# Altium PCB PCB1.PcbDoc
Units mil, origin at the board's own origin, x right, y up, seen from the top; angles counter-clockwise.
Board outline 1020 x 805 mil, 2 copper layers (Top Layer, Bottom Layer); 7 components, 4 nets, 15 pads, 0 vias.
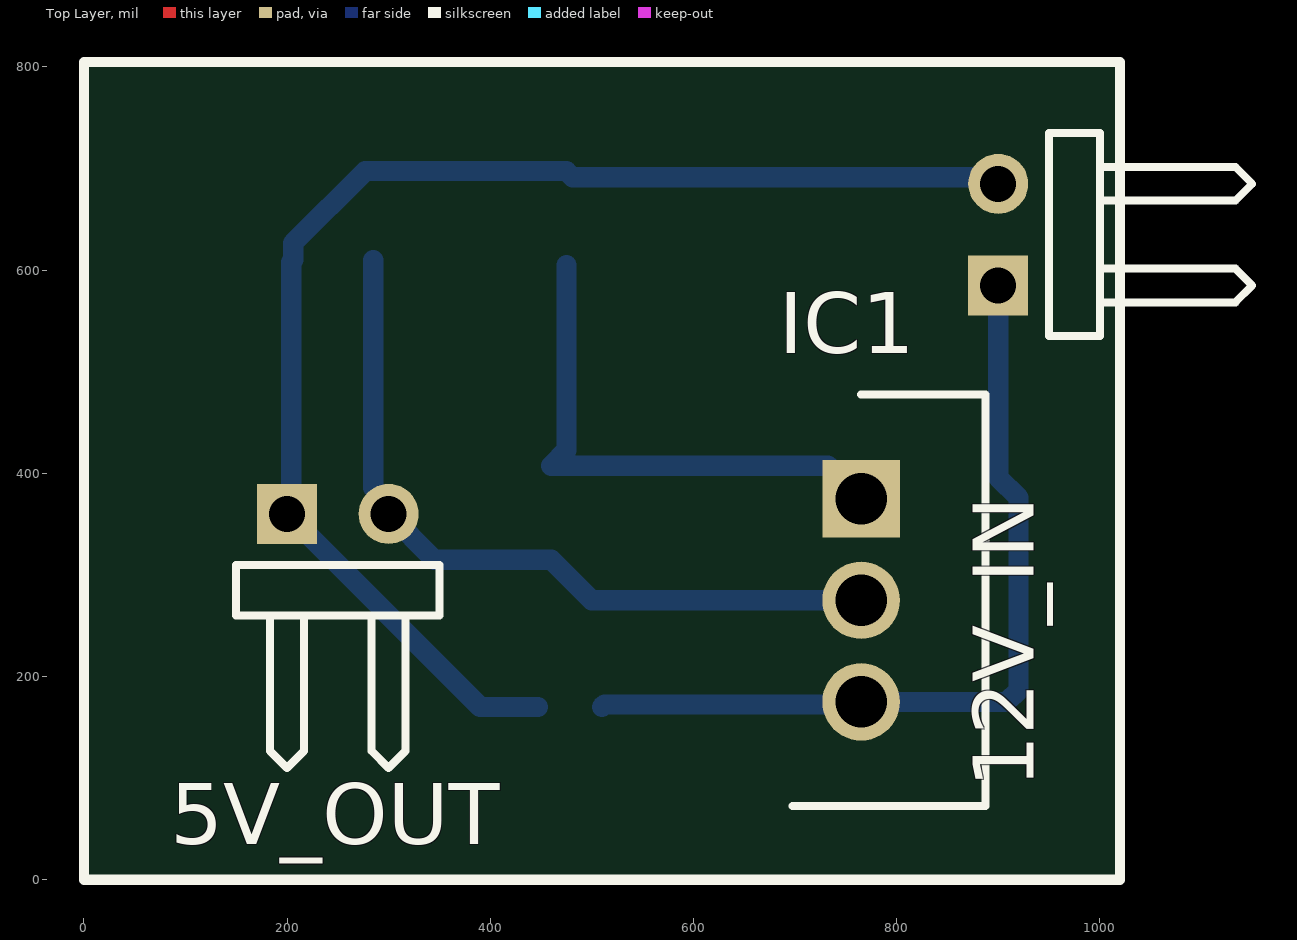
[diagram p0: Top Layer view]
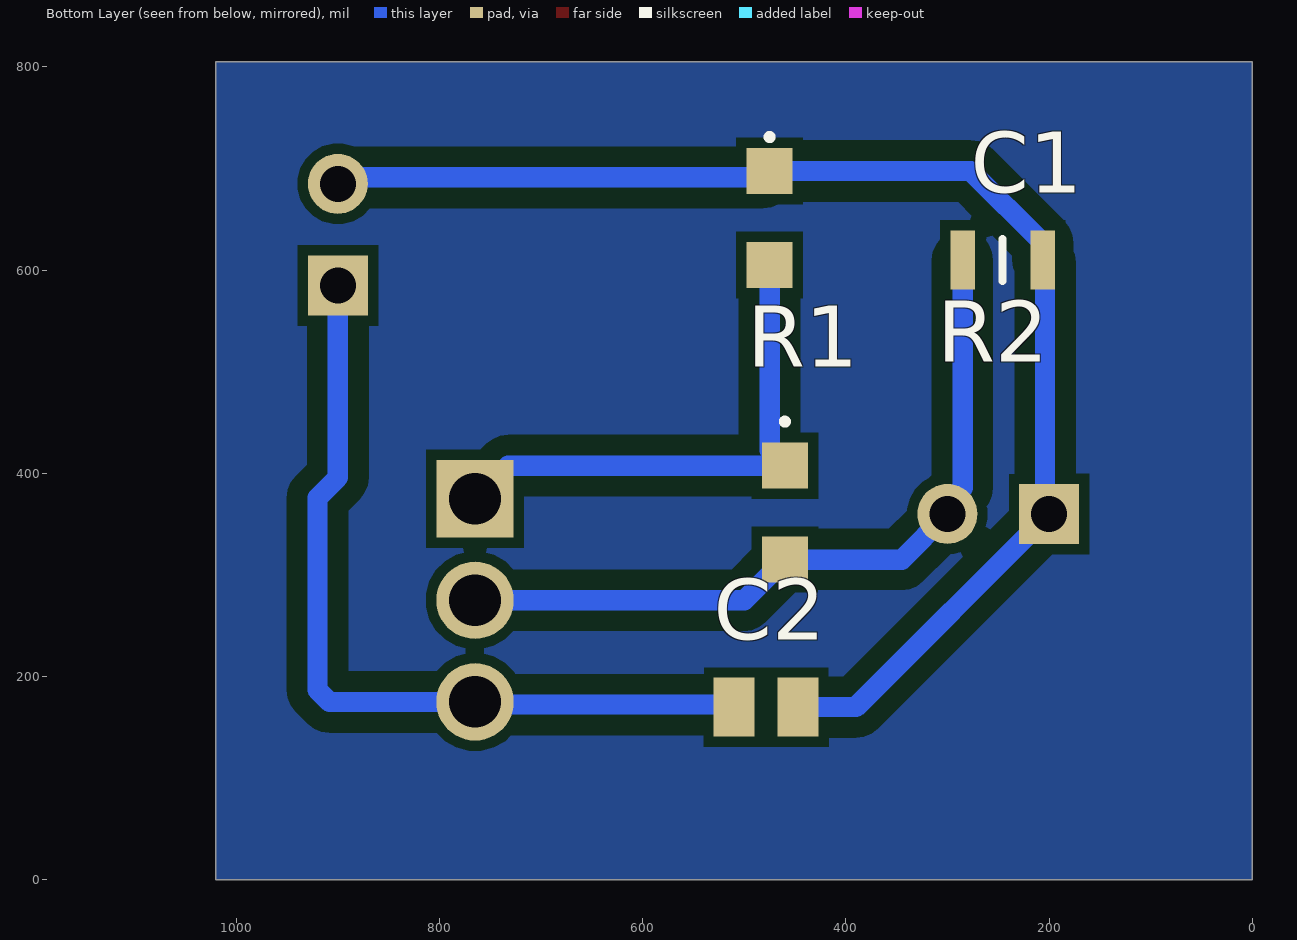
[diagram p1: Bottom Layer view, seen from below]
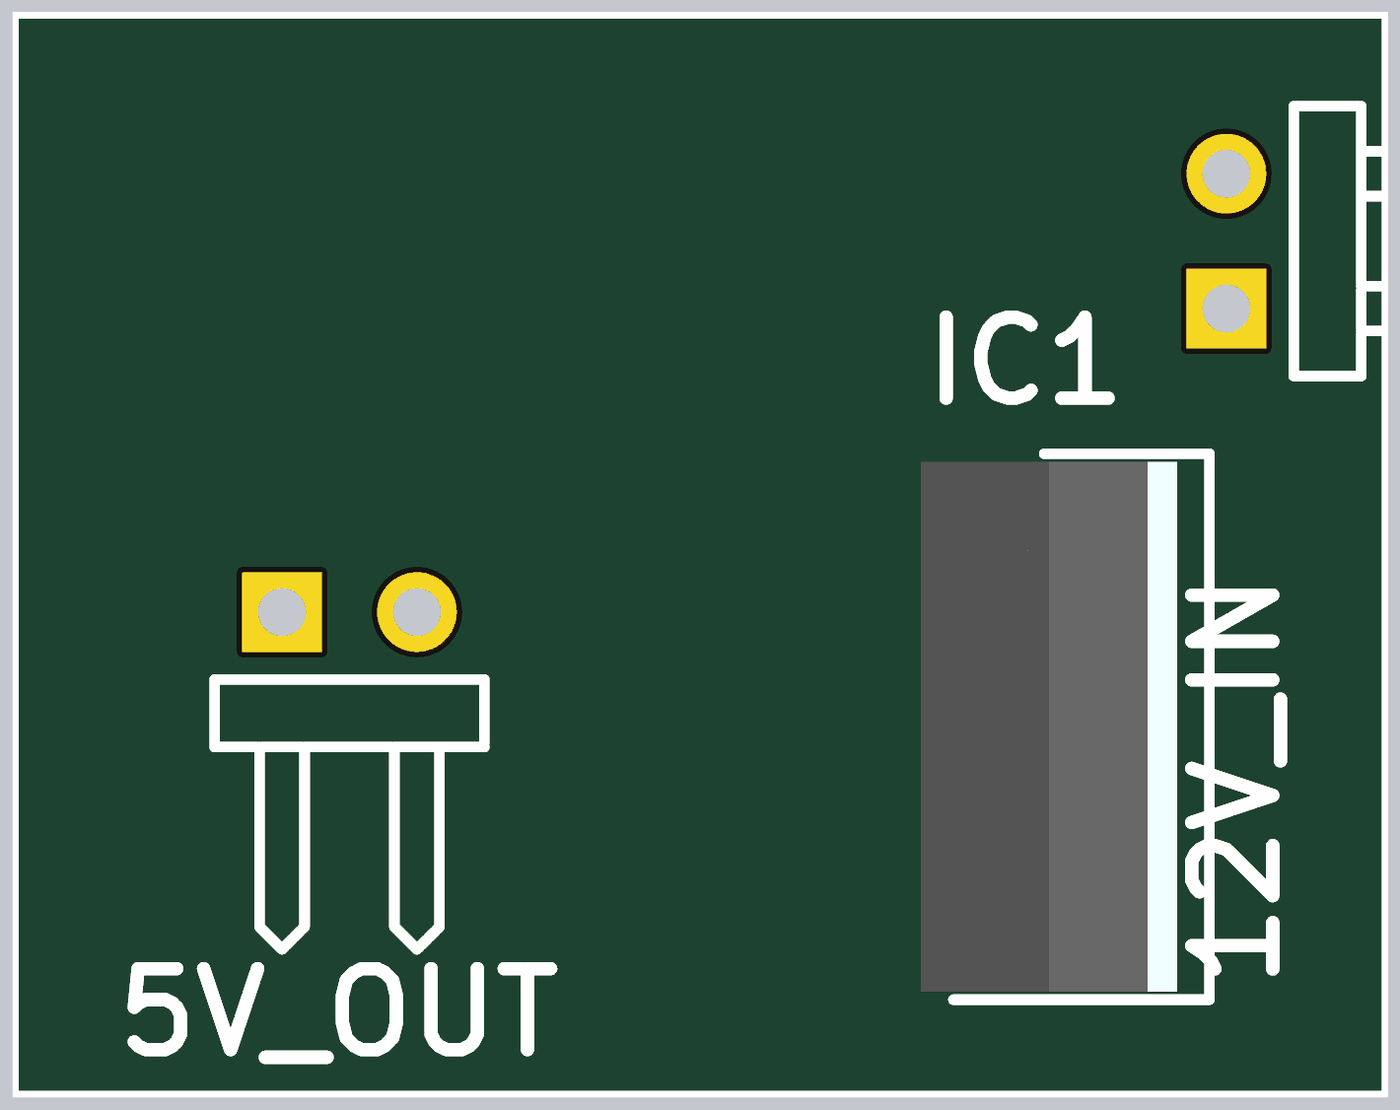
[diagram p2: 3D render of the assembled board from above, using the file's embedded part models]
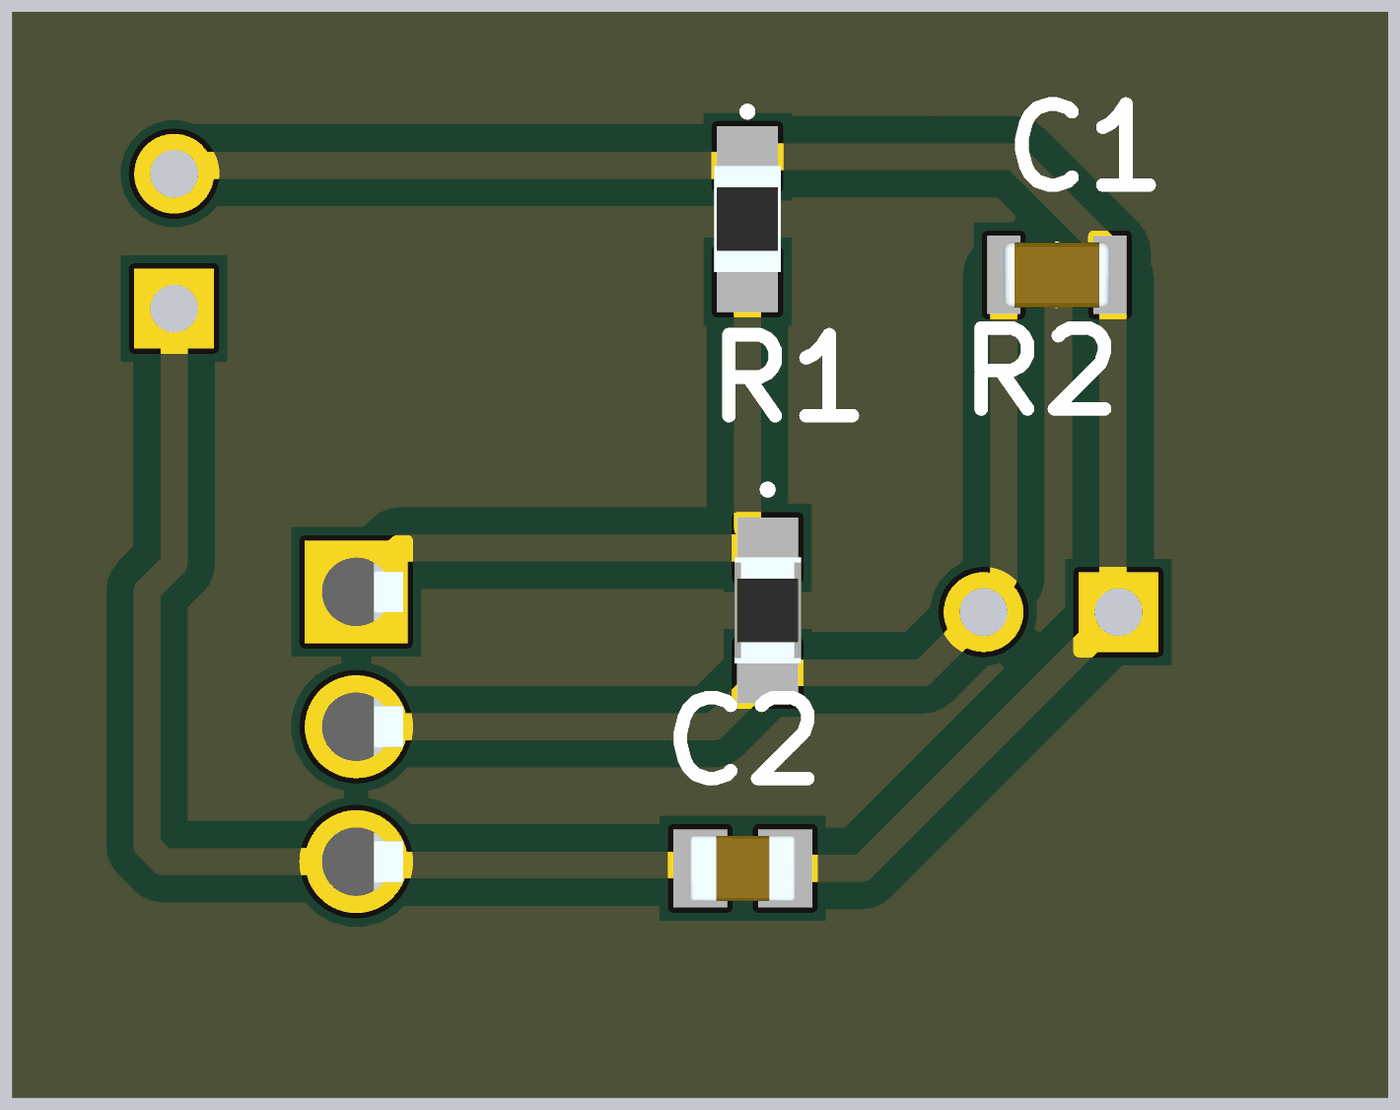
[diagram p3: 3D render of the assembled board from below, using the file's embedded part models]

## Layer stack, top to bottom
Top Solder: solder mask 0.4, Solder Resist, Dk 3.5
Top Layer: signal copper 1.4
Dielectric 1: dielectric 12.6, FR-4, Dk 4.8
Bottom Layer: signal copper 1.4
Bottom Solder: solder mask 0.4, Solder Resist, Dk 3.5

## Board outline
0,0 0,805 1020,805 1020,0

## Design rules (kind name [scope] priority, off if disabled: settings)
Clearance [All] p1: gap=10 ignorepadtopadclearanceinfootprint=FALSE except(0: Arc-Hole Track-Hole SMDPad-Hole THPad-Hole Via-Hole Fill-Hole Poly-Hole Region-Hole Text-Hole; 20: Arc-Fill Arc-Poly Arc-Region Track-Fill Track-Poly Track-Region)
PolygonConnect [All] p1: connectstyle=Relief reliefconductorwidth=10 reliefentries=4 polygonreliefangle="90 Angle" airgapwidth=10
RoutingLayers [All] p1: top layer_v5=FALSE bottom layer_v5=TRUE
RoutingVias [All] p1: holewidth=28 width=50 viastyle="Through Hole" minholewidth=28 minwidth=50 maxholewidth=28 maxwidth=50
SolderMaskExpansion [All] p1: expansion=4 istentingtop=FALSE
Width [All] p1: maxlimit=20 minlimit=20 preferedwidth=20
29 further rules are at their usual default settings.

## Components (designator, comment, footprint, x,y, rotation, side; value= is the part's Value field where it differs from the comment)
5V_OUT "Header 2H" HDR1X2H 200,360 r0 top
12V_IN "Header 2H" HDR1X2H 900,585 r90 top
C1 "1uF" CAPC2012X145N 245.63,610 r0 bottom
C2 "0.1uF" CAPC2012X88N 478.5,170 r0 bottom
IC1 "LM317TG" TO254P482X997X2018-3P 765,375 r270 top
R1 "1.6K" ERA6A_(0805) 460,361.26 r270 bottom
R2 "4.8K" ERA6VK 475,651.26 r270 bottom

## Footprints (in the part's own frame and the unit in brackets; to place one, negate y for a bottom-side part, rotate by r counter-clockwise, add the part's x,y. Pads: shape width x height; smd on the part's side, far side on the other; paste and mask are expansions set on the pad)
CAPC2012X88N [mm]
  rect 1.02x1.47 smd: 1(-0.8,0) 2(0.8,0)
  body extent -1,-0.63 1,0.63, height 0.88
CAPC2012X145N [mm]
  rect 0.62x1.47 smd: 1(-1,0) 2(1,0)
  silkscreen extent 0,-0.53 0,0.53, body extent -1,-0.63 1,0.63, height 1.45
ERA6A_(0805) [mm]
  rect 1.15x1.15 smd: 1(-1.175,0) 2(1.175,0)
  silkscreen extent -2.32,-0.05 -2.23,0.05, body extent -1,-0.63 1,0.63, height 0.5
ERA6VK [mm]
  rect 1.15x1.15 smd: 1(-1.175,0) 2(1.175,0)
  silkscreen extent -2.07,-0.05 -1.98,0.05, body extent -1,-0.63 1,0.63, height 0.56
HDR1X2H [mm] "Connector; Header; 2 Position; Right Angle"
  rect 1.5x1.5 hole 0.9: 1(0,0)
  round 1.5 hole 0.9: 2(2.54,0)
  silkscreen extent -1.27,-6.35 3.81,-1.27, body extent -1.14,-3.05 7.75,3.3, height 5
TO254P482X997X2018-3P [mm]
  rect 1.935x1.935 hole 1.29: 1(0,0)
  round 1.935 hole 1.29: 2(2.54,0) 3(5.08,0)
  silkscreen extent -2.6,-1.71 7.68,3.11, body extent -2.44,-2.32 7.52,2.5, height 18.48

## Part data
5V_OUT 12V_IN: "Header, 2-Pin, Right Angle", LatestRevisionDate=17-Jul-2002, LatestRevisionNote="Re-released for DXP Platform.", Publisher="Altium Limited"
C1: library part CGA4J1X8L1H105K125AE, "Capacitor", Manufacturer_Name=TDK, Mouser Part Number=810-CGA4J1X8L1H10512, Arrow Part Number=CGA4J1X8L1H105K125AE, Arrow Price/Stock=https://www.arrow.com/en/products/cga4j1x8l1h105k125ae/tdk?region=nac, Datasheet Link=https://product.tdk.com/system/files/dam/doc/product/capacitor/ceramic/mlcc/catalog/mlcc_automotive_soft_en.pdf, Height=1.45mm, Manufacturer_Part_Number=CGA4J1X8L1H105K125AE, Mouser Price/Stock=https://www.mouser.co.uk/ProductDetail/TDK/CGA4J1X8L1H105K125AE?qs=zW32dvEIR3sNqGICW%2F0Hww%3D%3D
C2: library part C0805C104K8RACAUTO, "Capacitor", Manufacturer_Name=Kemet, Mouser Part Number=80-C0805C104K8RAUTO, Datasheet Link=https://ad.componentsearchengine.com/Datasheets/2/C0805C104K8RACAUTO.pdf, Height=0.88mm, Manufacturer_Part_Number=C0805C104K8RACAUTO, Mouser Price/Stock=https://www.mouser.co.uk/ProductDetail/KEMET/C0805C104K8RACAUTO?qs=ds50AKTGxA8vmn6TMGYnqg%3D%3D
IC1: "Integrated Circuit", Manufacturer_Name="ON Semiconductor", Mouser Part Number=863-LM317TG, Arrow Part Number=LM317TG, Arrow Price/Stock=https://www.arrow.com/en/products/lm317tg/on-semiconductor?region=europe, Datasheet Link=http://www.onsemi.com/pub/Collateral/LM317-D.PDF, Height=4.82mm, Manufacturer_Part_Number=LM317TG, Mouser Price/Stock=https://www.mouser.co.uk/ProductDetail/onsemi/LM317TG?qs=2OtswVQKCOFN3Xj61Z7S9w%3D%3D
R1: library part ERA-6ARB162V, "Resistor", Manufacturer_Name=Panasonic, Mouser Part Number=667-ERA-6ARB162V, Datasheet Link=http://industrial.panasonic.com/cdbs/www-data/pdf/RDM0000/AOA0000C307.pdf, Height=0.6mm, Manufacturer_Part_Number=ERA-6ARB162V, Mouser Price/Stock=https://www.mouser.com/Search/Refine.aspx?Keyword=667-ERA-6ARB162V
R2: library part ERA-6VEB4702V, "Resistor", Manufacturer_Name=Panasonic, Mouser Part Number=667-ERA-6VEB4702V, Arrow Part Number=ERA-6VEB4702V, Arrow Price/Stock=https://www.arrow.com/en/products/era-6veb4702v/panasonic?region=nac, Datasheet Link=http://industrial.panasonic.com/cdbs/www-data/pdf/RDM0000/RDM0000C331.pdf, Height=0.65mm, Manufacturer_Part_Number=ERA-6VEB4702V, Mouser Price/Stock=https://www.mouser.co.uk/ProductDetail/Panasonic/ERA-6VEB4702V?qs=rI7uf1IzohRM7rriIYHLwg%3D%3D

## Nets (pads, with @x,y where several pads share a name; then routed paths per layer and width w, separated by ;. In a path a pad name is that pad's centre, name@x,y a point inside that pad or via, vN(x,y) a via of type N, cw(c..) or ccw(c..) an arc to the next point about the centre after c; other vN are vias at no path point)
GND: 5V_OUT.1 12V_IN.2 C1.1 C2.1 R2.1 | length 1323.3
  Bottom Layer w20: C2.1 390,170 5V_OUT.1 204.06,364.06 204.06,607.8 C1.1 206.26,626.73 277.05,697.52 R2.1 481.26,691.26 893.74,691.26 12V_IN.2
Net5V_OUT_2: 5V_OUT.2 C1.2 IC1.2 R1.2 | length 756.4
  Bottom Layer w20: C1.2 285,385.57 300,370.57 5V_OUT.2 345,315 R1.2 500,275 IC1.2
Net12V_IN_1: 12V_IN.1 C2.2 IC1.3 | length 823.5
  Bottom Layer w20: C2.2 512.5,172.5 762.5,172.5 IC1.3 908.28,175 920,186.72 920,375.86 900,395.86 12V_IN.1
NetIC1_1: IC1.1 R1.1 R2.2 | length 522.2
  Bottom Layer w20: R2.2 475,422.52 R1.1 732.48,407.52 IC1.1

## Polygon pours and split planes (outlines as drawn)
no net on Bottom Layer "NONET_L02_P000" (solid, pour order 0): 0,805 1020,805 1020,0 0,0

## Silkscreen, mask and mechanical layers (free items; w line width, h text height)
Top Overlay:
  the board outline again, w10
Mechanical 4:
  the board outline again, w10